# EAGLE board TeklaShieldThroughHole (EAGLE 5.11)
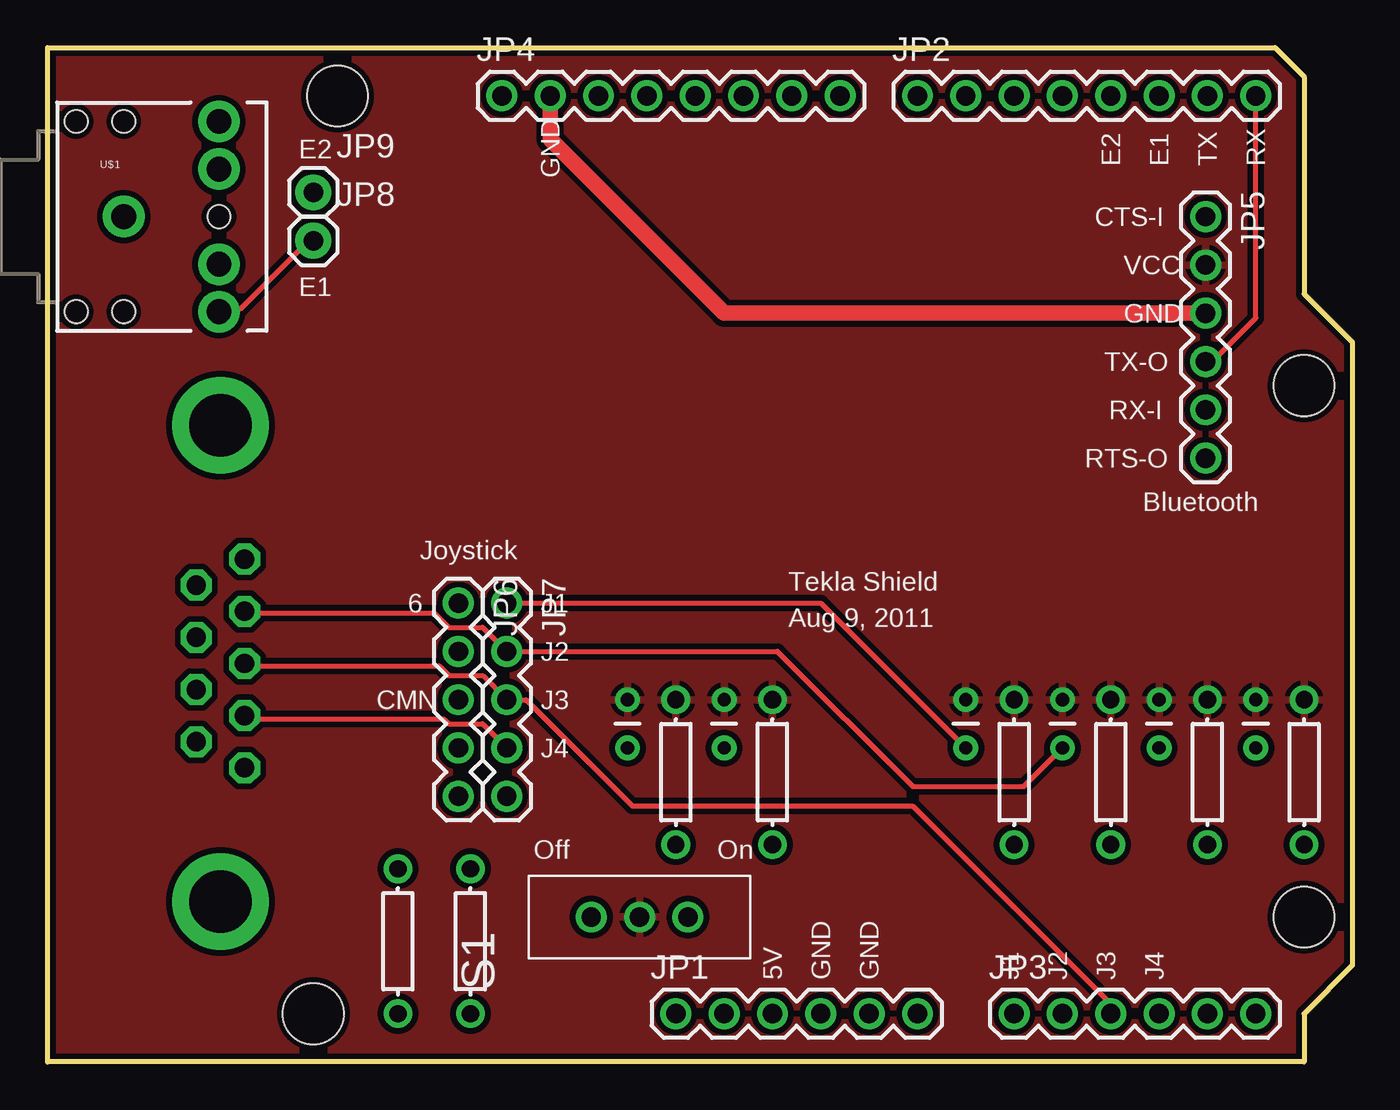
[diagram p0: board, top side]
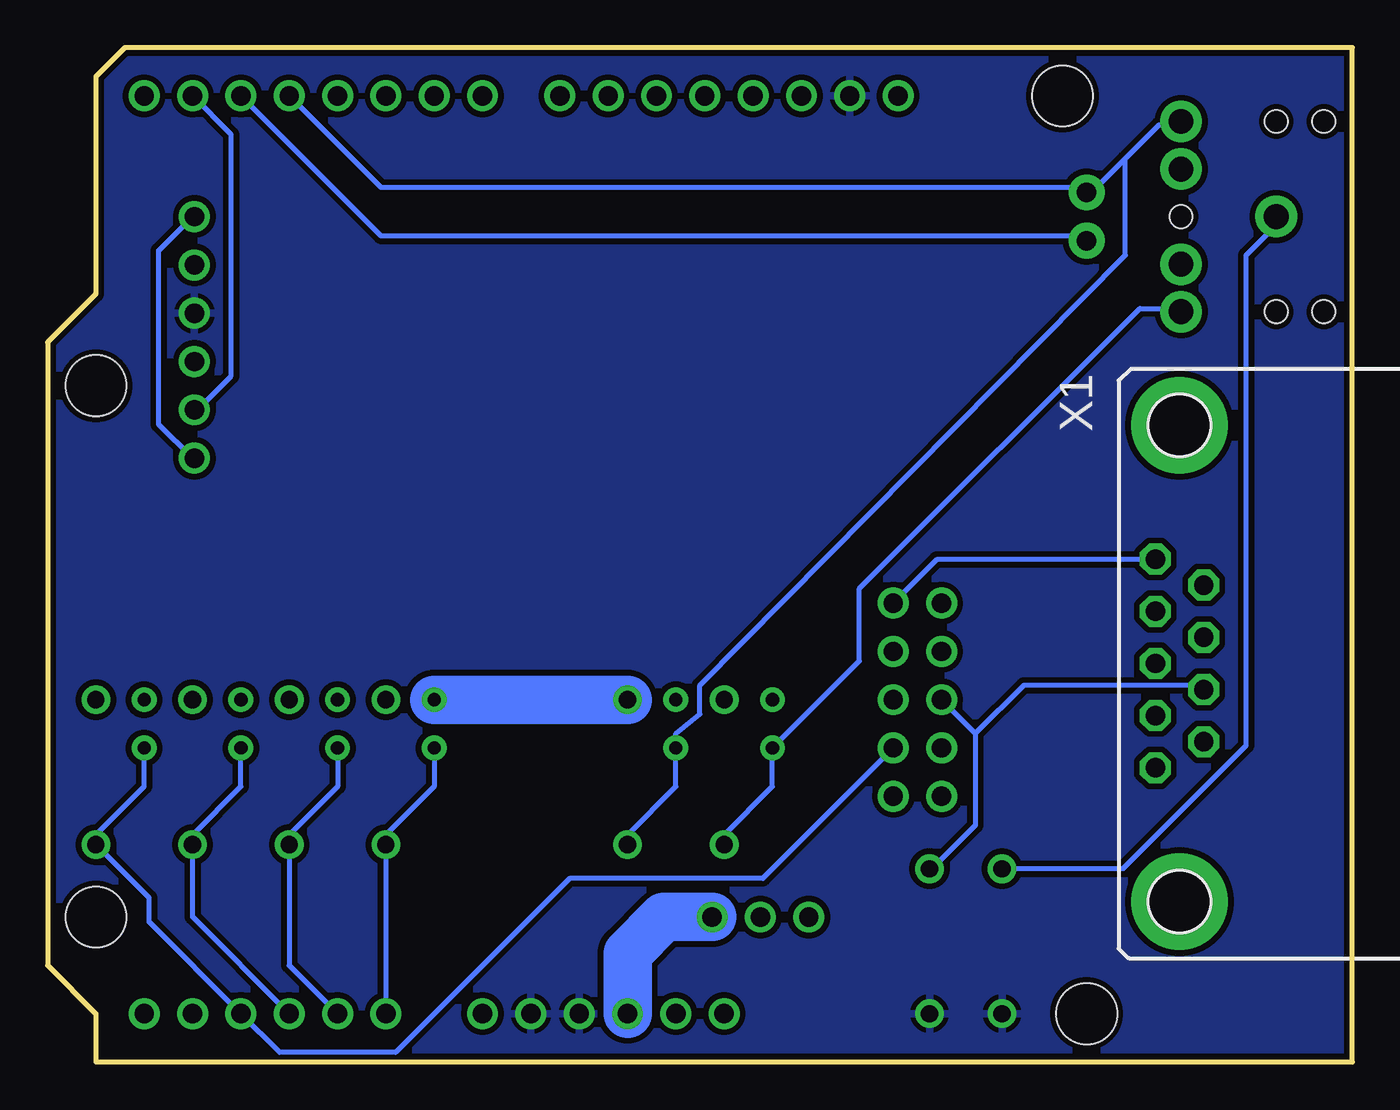
[diagram p1: board, bottom side, seen from below]

Size 68.58 x 53.34 mm. Coordinates in mm from the lower left corner, seen from the top.
Outline: 0,53.34 64.52,53.34 66.04,51.82 66.04,40.39 68.58,37.85 68.58,5.08 66.04,2.54 66.04,0 0,0 0,53.34
Copper layers (1*16): Top 0.035mm / dielectric 1.5mm / Bottom 0.035mm
Design rules "SparkFun *": minimum track width 10mil, minimum drill 20mil, track to track 8mil, track to pad 8mil, pad to pad 8mil, via to via 8mil, smd to smd 8mil, copper to edge 10mil, drill to drill 8mil, minimum pad ring 12mil, minimum via ring 10mil, stop-mask expansion 4mil, vias tented up to drill 25mil, thermal gap 10mil
Holes 3.2 mm at 66.04,35.56 66.04,7.62 15.24,50.8 13.97,2.54

## Footprints (pad centres in the part's own frame; a part is rotated, then mirrored left to right if it is on the bottom)
CAP-PTH-SMALL = drill 0.7 round: 1 0,0; 2 2.54,0
1X06 = drill 1.016 round: 1 0,0; 2 2.54,0; 3 5.08,0; 4 7.62,0; 5 10.16,0; 6 12.7,0
1X08 = drill 1.016 round: 1 0,0; 2 2.54,0; 3 5.08,0; 4 7.62,0; 5 10.16,0; 6 12.7,0; 7 15.24,0; 8 17.78,0
1X05 = drill 1.016 round: 1 0,0; 2 2.54,0; 3 5.08,0; 4 7.62,0; 5 10.16,0
1X01 = drill 1.016 pad 1.88 round: 1 0,0
AXIAL-0.3 = drill 0.9 round: P$1 -3.81,0; P$2 3.81,0
SWITCH-SPST = drill 1.016 round: 1 0,2.54; 2 0,0; 3 0,-2.54
AUDIO-JACK = drill 1.3 pad 2.184 round: 1 0,0; 2 5,5; 3 5,2.5; 4 5,-2.5; 5 5,-5 | hole 1.2: 0,5; -2.5,5; -2.5,-5; 0,-5; 5,0
DB9 = drill 1.016 octagon: 1 -5.486,-1.27; 2 -2.743,-1.27; 3 0,-1.27; 4 2.743,-1.27; 5 5.486,-1.27; 6 -4.115,1.27; 7 -1.372,1.27; 8 1.372,1.27; 9 4.115,1.27 | drill 3.302 pad 5.08 round: G1 -12.522,0; G2 12.522,0

## Placement (x,y rotation side)
C1  2.2uF  [CAP-PTH-SMALL]  63.5,19.05 270 top
C2  2.2uF  [CAP-PTH-SMALL]  58.42,19.05 270 top
C3  2.2uF  [CAP-PTH-SMALL]  53.34,19.05 270 top
C4  2.2uF  [CAP-PTH-SMALL]  48.26,19.05 270 top
C5  2.2uF  [CAP-PTH-SMALL]  30.48,19.05 270 top
C6  2.2uF  [CAP-PTH-SMALL]  35.56,19.05 270 top
JP1  Power  [1X06]  33.02,2.54 0 top
JP2  Digital1  [1X08]  45.72,50.8 0 top
JP3  Analog  [1X06]  50.8,2.54 0 top
JP4  Digital2  [1X08]  23.88,50.8 0 top
JP5  Bluetooth  [1X06]  60.87,44.45 270 top
JP6  Joystick1  [1X05]  21.59,24.13 270 top
JP7  Joystick2  [1X05]  24.13,24.13 270 top
JP8  Extra Pin  [1X01]  13.97,43.18 0 top
JP9  Extra Pin  [1X01]  13.97,45.72 0 top
R1  3.6K  [AXIAL-0.3]  66.04,15.24 90 top
R2  3.6K  [AXIAL-0.3]  60.96,15.24 90 top
R3  3.6K  [AXIAL-0.3]  55.88,15.24 90 top
R4  3.6K  [AXIAL-0.3]  50.8,15.24 90 top
R5  3.6K  [AXIAL-0.3]  33.02,15.24 90 top
R6  3.6K  [AXIAL-0.3]  38.1,15.24 90 top
R7  510  [AXIAL-0.3]  22.23,6.35 90 top
R8  510  [AXIAL-0.3]  18.41,6.35 90 top
S1  [SWITCH-SPST]  31.11,7.62 90 top
U$1  AUDIO-JACKPTH  [AUDIO-JACK]  4,44.45 0 top
X1  DE9Male  [DB9]  9.09,20.95 270 bottom

## Library data of the parts
C1-C6 JP1-JP7 R1-R8 S1 X1 = SparkFun-3-2-07
JP8 JP9 U$1 = SparkFun

## Nets
E1: C5.2 JP2.6 JP8.1 R5.P$1 U$1.5
E2: C6.2 JP2.5 JP9.1 R6.P$1 U$1.2
ECMN: R8.P$2 U$1.1
GND: JP1.4 JP1.5 JP4.2 JP5.3 R7.P$1 R8.P$1
J1: C4.2 JP3.1 JP7.1 R4.P$1 X1.1
J2: C3.2 JP3.2 JP7.2 R3.P$1 X1.2
J3: C2.2 JP3.3 JP7.3 R2.P$1 X1.3
J4: C1.2 JP3.4 JP7.4 R1.P$1 X1.4
JCMN: JP6.3 R7.P$2 X1.8
N$1: JP2.8 JP5.4
N$2: JP2.7 JP5.5
N$3: JP1.3 S1.3
N$4: JP5.1 JP5.6
VCC: C1.1 C2.1 C3.1 C4.1 C5.1 C6.1 JP5.2 R1.P$2 R2.P$2 R3.P$2 R4.P$2 R5.P$2 R6.P$2 S1.2

## Tracks (layer width: path | path; a pad name or v marks a point on that pad's centre or on a via)
E1
  Top 0.254: JP8.1 13.72,43.18 10.16,39.62 9.14,39.62 U$1.5
  Bottom 0.254: R5.P$1 33.02,11.94 30.48,14.48 C5.2 25.91,21.08 25.91,24.89 11.18,39.62 9.14,39.62 U$1.5 | JP2.6 51.05,43.43 14.22,43.43 JP8.1
E2
  Bottom 0.254: R6.P$1 38.1,11.94 35.56,14.48 C6.2 35.56,17.27 34.29,18.29 34.29,19.81 11.94,42.42 11.94,47.5 | JP2.5 51.05,45.97 14.22,45.97 JP9.1 13.72,45.72 11.94,47.5 | 11.94,47.5 10.16,49.28 9.14,49.28 U$1.2
ECMN
  Bottom 0.254: R8.P$2 12.06,10.16 5.59,16.64 5.59,42.42 4.06,43.94 4.06,44.45 U$1.1
GND
  Top 0.813: JP4.2 26.42,48.51 35.56,39.37 JP5.3
  pour Bottom (isolate 0.305): 0,53.34 68.58,53.34 68.58,0 0,0
J1
  Top 0.254: C4.2 40.64,24.13 JP7.1
  Bottom 0.254: C4.2 48.26,14.48 50.8,11.94 R4.P$1 JP3.1 | JP7.1 21.84,26.42 10.41,26.42 X1.1
J2
  Top 0.254: X1.2 10.41,23.62 20.32,23.62 21.08,22.86 22.86,22.86 JP7.2 38.35,21.59 45.47,14.48 51.31,14.48 C3.2
  Bottom 0.254: C3.2 53.34,14.48 55.88,11.94 R3.P$1 55.88,5.08 JP3.2
J3
  Top 0.254: X1.3 10.41,20.83 20.57,20.83 21.08,20.32 22.86,20.32 JP7.3 25.15,19.05 30.73,13.46 45.47,13.46 55.88,3.05 JP3.3
  Bottom 0.254: C2.2 58.42,14.48 60.96,11.94 R2.P$1 60.96,7.62 JP3.3
J4
  Top 0.254: JP7.4 22.86,17.78 21.08,17.78 20.83,18.03 10.41,18.03 X1.4
  Bottom 0.254: C1.2 63.5,14.48 66.04,11.94 R1.P$1 63.25,8.64 63.25,7.37 JP3.4 56.39,0.51 50.29,0.51 41.15,9.65 30.99,9.65 JP7.4
JCMN
  Bottom 0.254: 19.81,17.27 19.81,12.45 22.1,10.16 R7.P$2 | 19.81,17.27 JP6.3 | 19.81,17.27 17.27,19.81 7.87,19.81 X1.8
N$1
  Top 0.254: JP2.8 63.5,39.12 61.21,36.83 JP5.4
N$2
  Bottom 0.254: JP2.7 58.93,48.77 58.93,36.07 60.71,34.29 JP5.5
N$3
  Bottom 2.54: S1.3 36.2,7.62 38.1,5.71 JP1.3
N$4
  Top 0.203: JP5.6 60.96,31.7 60.96,31.75
  Top 0.254: JP5.6 60.96,31.75
  Bottom 0.254: JP5.6 60.96,31.75 62.74,33.53 62.74,42.67 60.96,44.45 JP5.1
VCC
  Bottom 2.54: R6.P$2 C4.1
  pour Top (isolate 0.305): 0,53.34 68.58,53.34 68.58,0 0,0

## Text on the board
tPlace: E2 | E2 | E1 | TX | RX | GND | CTS-I | VCC | E1 | GND | TX-O | RX-I | RTS-O | Bluetooth | Joystick | Tekla Shield | 6 | J1 | Aug 9, 2011 | J2 | CMN | J3 | J4 | Off | On | 5V | GND | GND | J1 | J2 | J3 | J4